# EAGLE board roboboard2_backup1 (EAGLE 6.3)
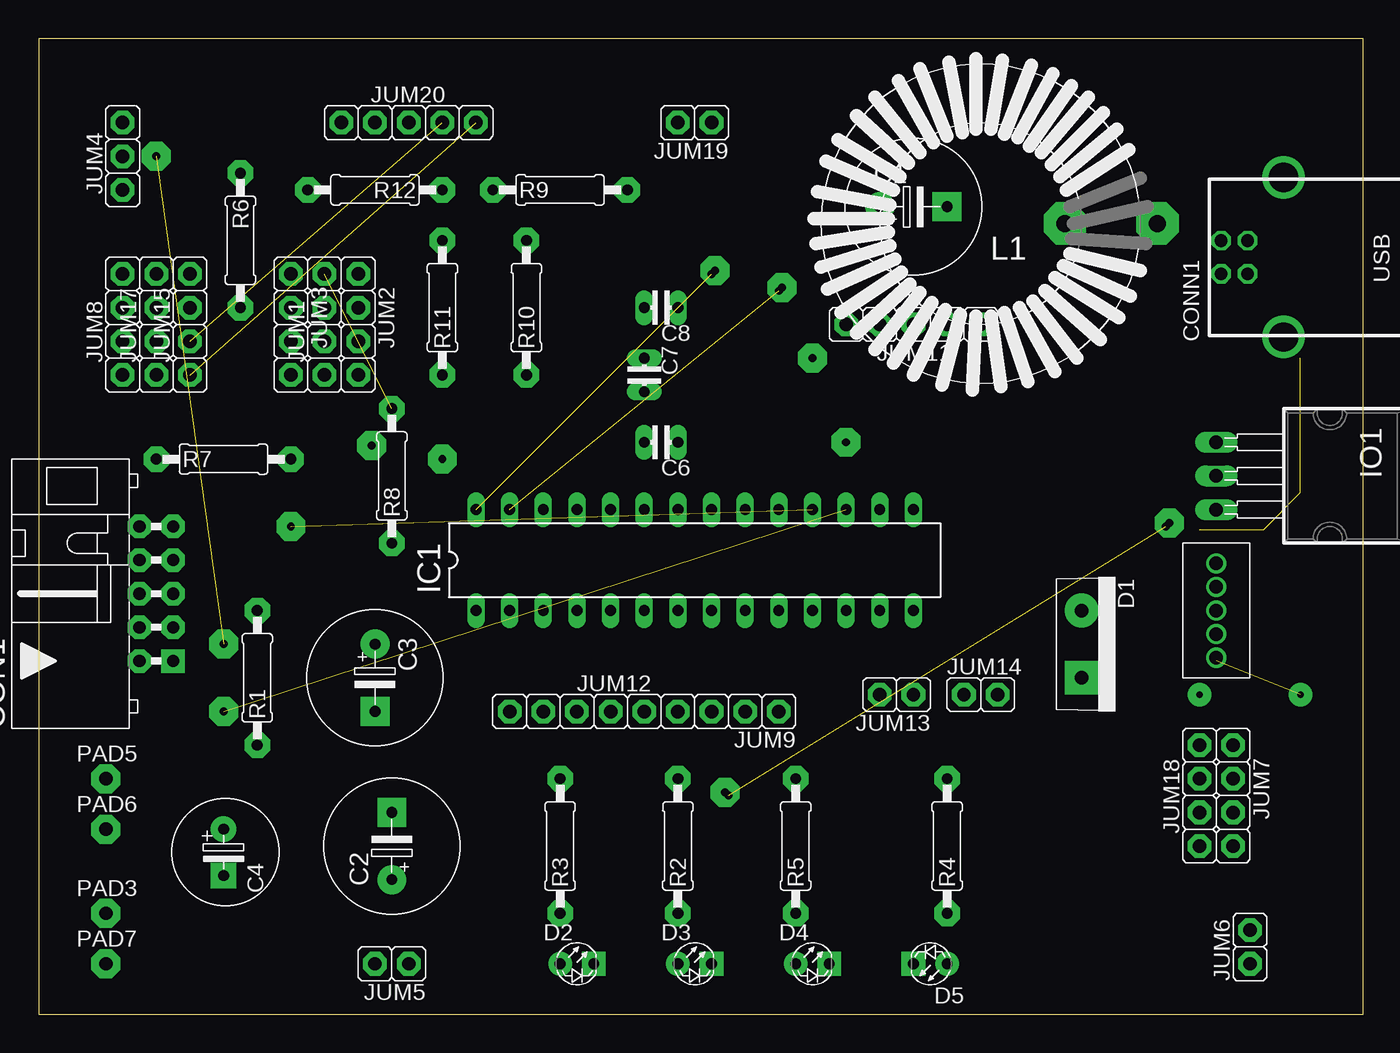
[diagram p0: board, top side]
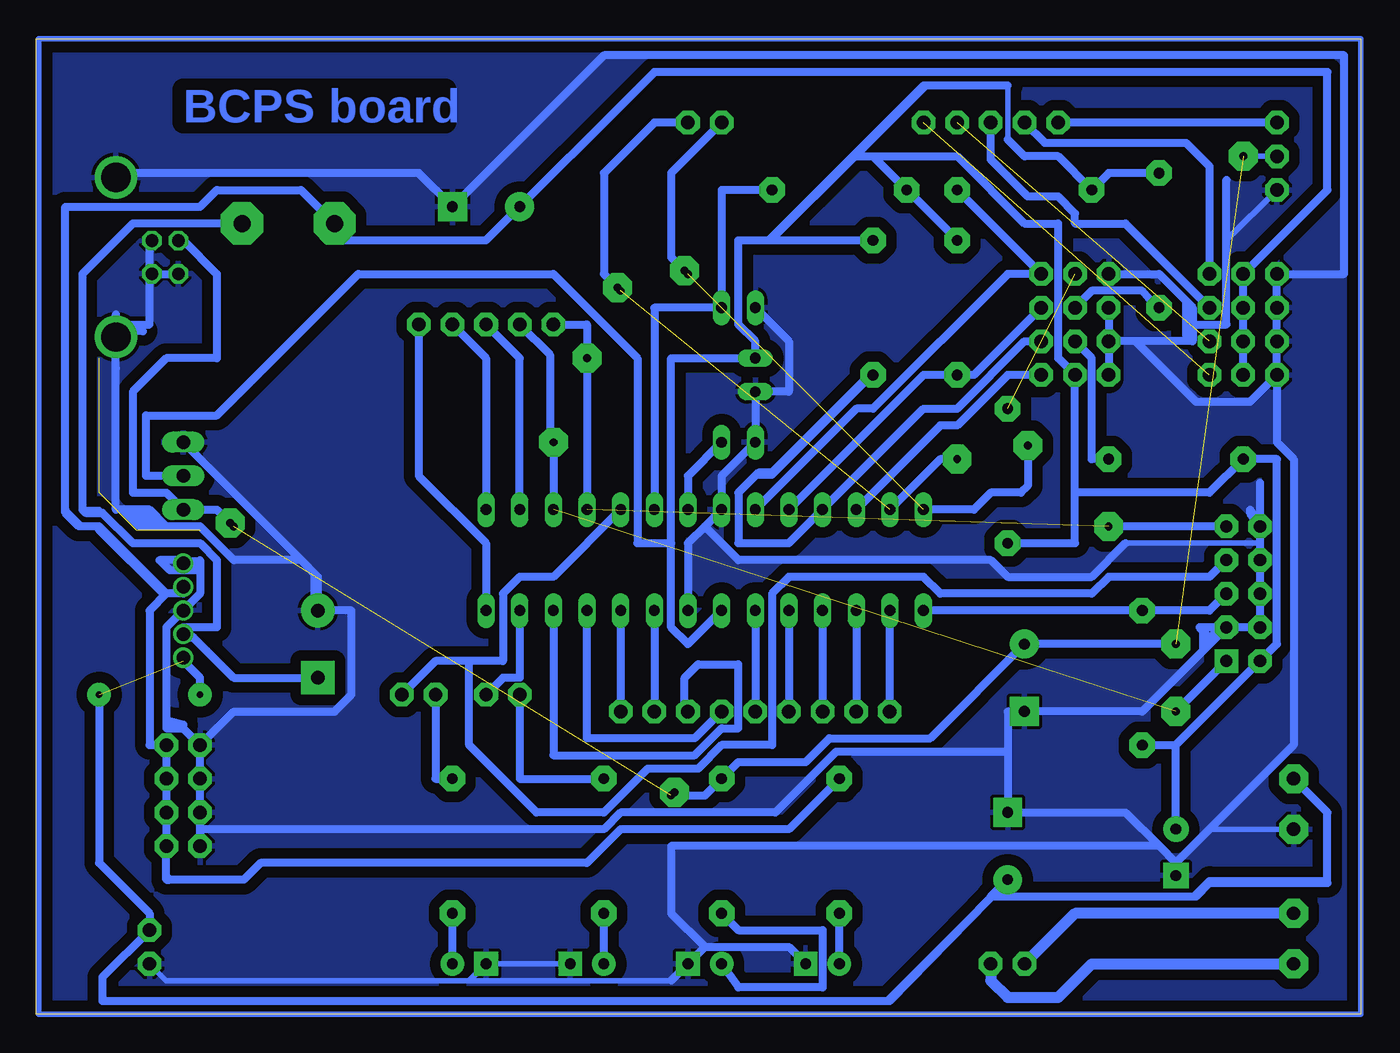
[diagram p1: board, bottom side, seen from below]

Size 100 x 73.65 mm. Coordinates in mm from the lower left corner, seen from the top.
Outline: 0,0 100,0 100,73.65 0,73.65 0,0
Copper layers (1*16): Top 0.035mm / dielectric 1.5mm / Bottom 0.035mm
Design rules "default": minimum track width 10mil, minimum drill 24mil, track to track 8mil, track to pad 8mil, pad to pad 8mil, via to via 8mil, smd to smd 8mil, copper to edge 40mil, drill to drill 8mil, minimum pad ring 10mil, minimum via ring 8mil, stop-mask expansion 4mil, vias tented up to drill 0mil, thermal gap 10mil

## Footprints (pad centres in the part's own frame; a part is rotated, then mirrored left to right if it is on the bottom)
C-EL_5 = drill 0.813 pad 2.184: C+ -2.54,0 | drill 0.813 pad 2.184 square: C- 2.54,0
C-EL_3,5 = drill 0.813 pad 1.93: C+ 0,0 | drill 0.813 pad 1.93 square: C- 3.493,0
C-2,5 = drill 0.813 pad 1.27 long: 1 -1.27,0; 2 1.27,0
MLW10A = drill 0.914 pad 1.778 square: 1 -5.08,-1.27 | drill 0.914 pad 1.778 octagon: 2 -5.08,1.27; 3 -2.54,-1.27; 4 -2.54,1.27; 5 0,-1.27; 6 0,1.27; 7 2.54,-1.27; 8 2.54,1.27; 9 5.08,-1.27; 10 5.08,1.27
PN61729 = drill 0.95 octagon: 1 1.25,4.71; 2 -1.25,4.71; 3 -1.25,2.71; 4 1.25,2.71 | drill 2.2: P$1 -6.02,0; P$2 6.02,0
TO-220AC = drill 1.016 pad 2.54: A -2.54,0 | drill 1.016 pad 2.54 square: K 2.54,0
LED_3 = drill 0.813 pad 1.778: A -1.27,0 | drill 0.813 pad 1.778 square: K 1.27,0
DIL28-3 = drill 0.813 long: 1 -16.51,-3.81; 2 -13.97,-3.81; 3 -11.43,-3.81; 4 -8.89,-3.81; 5 -6.35,-3.81; 6 -3.81,-3.81; 7 -1.27,-3.81; 8 1.27,-3.81; 9 3.81,-3.81; 10 6.35,-3.81; 11 8.89,-3.81; 12 11.43,-3.81; 13 13.97,-3.81; 14 16.51,-3.81; 15 16.51,3.81; 16 13.97,3.81; 17 11.43,3.81; 18 8.89,3.81; 19 6.35,3.81; 20 3.81,3.81; 21 1.27,3.81; 22 -1.27,3.81; 23 -3.81,3.81; 24 -6.35,3.81; 25 -8.89,3.81; 26 -11.43,3.81; 27 -13.97,3.81; 28 -16.51,3.81
TO-220 = drill 1.016 pad 1.6 long: 1 -2.54,0; 2 0,0; 3 2.54,0
S1G4_JUM = drill 1.016 pad 1.778 octagon: 1 -3.81,0; 2 -1.27,0; 3 1.27,0; 4 3.81,0
S1G3_JUM = drill 1.016 pad 1.778 octagon: 1 -2.54,0; 2 0,0; 3 2.54,0
S1G2_JUM = drill 1.016 pad 1.778 octagon: 1 -1.27,0; 2 1.27,0
S1G5_JUM = drill 1.016 pad 1.778 octagon: 1 -5.08,0; 2 -2.54,0; 3 0,0; 4 2.54,0; 5 5.08,0
S1G7_JUM = drill 1.016 pad 1.778 octagon: 1 -7.62,0; 2 -5.08,0; 3 -2.54,0; 4 0,0; 5 2.54,0; 6 5.08,0; 7 7.62,0
FED_2200 = drill 1.27 pad 3.2 octagon: 1 -13.335,0; 2 -6.35,0
PAD_1 = drill 1.016 pad 2.184 octagon: 1 0,0
R-10 = drill 0.813 pad 1.93 octagon: 1 -5.08,0; 2 5.08,0
LM2576 = drill 1.016: 1 -3.556,0; 2 -1.778,0; 3 0,0; 4 1.778,0; 5 3.556,0

## Placement (x,y rotation side)
C1  1000uF  [C-EL_5]  66.04,60.96 0 top
C2  100uF  [C-EL_5]  26.67,12.7 90 top
C3  0,47uF  [C-EL_5]  25.4,25.4 270 top
C4  0,33uF  [C-EL_3,5]  13.97,13.97 270 top
C6  100n  [C-2,5]  46.99,43.18 180 top
C7  100n  [C-2,5]  45.72,48.26 270 top
C8  100n  [C-2,5]  46.99,53.34 180 top
CON1  ISP  [MLW10A]  8.89,31.75 90 top
CONN1  USB  [PN61729]  93.98,57.15 90 top
D1  1N5822  [TO-220AC]  78.74,27.94 270 top
D2  LED_3  [LED_3]  40.64,3.81 0 top
D3  LED_3  [LED_3]  49.53,3.81 0 top
D4  LED_3  [LED_3]  58.42,3.81 0 top
D5  LED_3  [LED_3]  67.31,3.81 180 top
IC1  MEGA8-P  [DIL28-3]  49.53,34.29 0 top
IO1  LM3940IT  [TO-220]  88.9,40.64 270 top
JUM1  senzory_ir_reflex  [S1G4_JUM]  21.59,52.07 90 top
JUM2  senzory_ir_reflex_signal  [S1G4_JUM]  24.13,52.07 270 top
JUM3  senzory_ir_reflex_GND  [S1G4_JUM]  19.05,52.07 270 top
JUM4  regulator_vstup  [S1G3_JUM]  6.35,64.77 90 top
JUM5  motor_6V_out  [S1G2_JUM]  26.67,3.81 180 top
JUM6  napajeni_Maestro  [S1G2_JUM]  91.44,5.08 90 top
JUM7  piny_+5V  [S1G4_JUM]  90.17,16.51 270 top
JUM8  senzor_vzdal_-  [S1G4_JUM]  6.35,52.07 90 top
JUM9  S1G2_JUMP  [S1G2_JUM]  54.61,22.86 180 top
JUM11  S1G5_JUMP  [S1G5_JUM]  66.04,52.07 180 top
JUM12  S1G7_JUMP  [S1G7_JUM]  43.18,22.86 0 top
JUM13  jumper  [S1G2_JUM]  64.77,24.13 180 top
JUM14  jumper1  [S1G2_JUM]  71.12,24.13 0 top
JUM15  senzor_vzdal_signal_in  [S1G4_JUM]  11.43,52.07 90 top
JUM17  senzor_vzdal_+  [S1G4_JUM]  8.89,52.07 90 top
JUM18  piny_-5V  [S1G4_JUM]  87.63,16.51 90 top
JUM19  I2C  [S1G2_JUM]  49.53,67.31 180 top
JUM20  out_vzdal_senzor_signal  [S1G5_JUM]  27.94,67.31 0 top
L1  100uH  [FED_2200]  71.12,59.69 180 top
PAD3  motor_6V_in  [PAD_1]  5.08,7.62 0 top
PAD5  11,1V  [PAD_1]  5.08,17.78 0 top
PAD6  PAD_1-  [PAD_1]  5.08,13.97 0 top
PAD7  6V_motor  [PAD_1]  5.08,3.81 0 top
R1  10k  [R-10]  16.51,25.4 90 top
R2  120  [R-10]  48.26,12.7 90 top
R3  120  [R-10]  39.37,12.7 90 top
R4  120  [R-10]  68.58,12.7 90 top
R5  120  [R-10]  57.15,12.7 90 top
R6  120  [R-10]  15.24,58.42 270 top
R7  120  [R-10]  13.97,41.91 0 top
R8  120  [R-10]  26.67,40.64 90 top
R9  10uH  [R-10]  39.37,62.23 0 top
R10  120  [R-10]  36.83,53.34 90 top
R11  120  [R-10]  30.48,53.34 90 top
R12  120  [R-10]  25.4,62.23 180 top
U$1  LM2576  [LM2576]  88.9,30.48 90 top

## Library data of the parts
C1-C4 C6-C8 CON1 D1-D5 IO1 JUM1-JUM9 JUM11-JUM15 JUM17-JUM20 L1 PAD3 PAD5-PAD7 R1-R12 = #PaJa_22
CONN1 = dodolcd
IC1 = atmel; OC_FARNELL: unknown; OC_NEWARK: unknown
U$1 = LM2576

## Nets
+5V: C1.C+ JUM7.1 JUM7.2 JUM7.3 JUM7.4 JUM17.1 JUM17.2 JUM17.3 JUM17.4 L1.2 R3.2 U$1.4
GND: C1.C- C2.C- C3.C- C4.C- C6.2 C7.2 C8.2 CON1.3 CON1.4 CON1.6 CON1.8 CON1.10 CONN1.2 CONN1.3 CONN1.4 CONN1.P$1 CONN1.P$2 D1.A D2.K D3.K D4.K D5.K IC1.8 IC1.22 IO1.1 JUM3.1 JUM3.2 JUM3.3 JUM3.4 JUM4.1 JUM6.1 JUM8.1 JUM8.2 JUM8.3 JUM8.4 JUM18.1 JUM18.2 JUM18.3 JUM18.4 PAD6.1 U$1.3 U$1.5
N$1: D1.K L1.1 U$1.2
N$2: C6.1 IC1.21
N$3: C8.1 IC1.20 R9.2
N$4: CON1.5 IC1.1 R1.2
N$5: IC1.24 JUM2.2 R11.1
N$6: IC1.25 JUM2.3 R10.1
N$7: IC1.23 JUM2.1 R12.1
N$8: IC1.26 JUM2.4
N$9: IC1.27 JUM19.1
N$10: IC1.28 JUM19.2
N$11: IC1.2 JUM12.1
N$12: IC1.3 JUM12.2
N$13: IC1.4 JUM12.3
N$14: IC1.5 JUM12.4
N$15: IC1.6 JUM12.5
N$16: IC1.11 JUM12.6
N$17: IC1.12 JUM12.7
N$18: IC1.13 JUM13.1
N$19: IC1.14 JUM11.1
N$20: IC1.15 JUM11.2
N$21: CON1.1 IC1.17 JUM11.4
N$22: IC1.16 JUM11.3
N$23: CON1.9 IC1.18 JUM11.5
N$24: CON1.7 IC1.19 JUM14.2
N$25: JUM5.1 PAD7.1
N$26: IC1.9 JUM9.2
N$28: D4.A R5.1
N$29: JUM4.3 JUM20.1
N$30: D3.A R2.1
N$31: D2.A R3.1
N$32: C2.C+ JUM6.2 PAD5.1 U$1.1
N$33: JUM5.2 PAD3.1
N$34: IC1.10 JUM9.1
N$35: D5.A R4.1
N$36: JUM13.2 R5.2
N$37: JUM1.2 R7.2
N$38: JUM1.3 R6.2
N$39: JUM1.4 R8.2
N$40: JUM14.1 R4.2
N$41: JUM15.1 JUM20.5
N$42: JUM15.2 JUM20.4
N$43: JUM15.3 JUM20.3
N$44: JUM15.4 JUM20.2
N$48: C4.C+ C7.1 CON1.2 IC1.7 IO1.2 JUM1.1 R1.1 R6.1 R7.1 R8.1 R9.1 R10.2 R11.2 R12.2
VCC: C3.C+ CONN1.1 IO1.3 JUM4.2 R2.2

## Tracks (layer width: path | path; a pad name or v marks a point on that pad's centre or on a via)
+5V
  Bottom 0.254: JUM7.1 JUM7.2 JUM7.3 90.17,12.95 | JUM17.1 JUM17.2 JUM17.3 JUM17.4 | 81.28,62.23 86.36,62.23
  Bottom 0.406: 53.34,71.12 C1.C+ 66.04,58.42 | JUM17.4 JUM17.1 | 97.79,38.1 96.52,36.83 95.25,36.83 | JUM7.4 90.17,12.95 | 88.9,31.75 U$1.4 | U$1.4 89.15,32.26 | 89.15,32.26 89.15,32 | 89.15,32.26 89.15,32.51 88.9,32.51 U$1.4
  Bottom 0.61: 90.17,10.41 90.17,10.16 89.92,10.16 | 90.17,10.41 90.17,12.95 JUM7.1 91.44,20.32 91.44,30.48 90.17,31.75 | 89.92,10.16 84.33,10.16 83.06,11.43 58.42,11.43 55.88,13.97 43.18,13.97 R3.2 | 89.92,10.16 90.17,10.41 | 90.17,31.75 88.9,31.75 88.9,32.51 | 95.25,36.83 95.25,36.58 90.42,31.75 90.17,31.75 | 95.25,36.83 90.17,31.75 | 95.25,36.83 96.77,36.83 97.79,37.85 97.79,38.1 97.79,60.96 87.63,60.96 86.36,62.23 80.01,62.23 L1.2 77.47,58.42 66.04,58.42 53.34,71.12 2.54,71.12 2.54,62.23 JUM17.4 8.89,48.01
GND
  Bottom 0.254: JUM18.1 JUM18.2 JUM18.3 JUM18.4 | 87.63,31.75 U$1.3 90.17,29.21 | 88.9,34.29 U$1.5 | 88.9,55.88 CONN1.2 | 91.44,58.42 CONN1.4 | 91.44,55.88 CONN1.3 | 93.98,52.07 CONN1.P$1 93.98,48.77 | 49.53,5.08 D3.K 52.07,2.54 | 93.98,63.5 CONN1.P$2 | JUM8.1 JUM8.2 JUM8.3 JUM8.4 | 7.62,35.56 CON1.8 CON1.6 CON1.4 | 26.67,22.86 C3.C- 16.51,22.86 | 13.97,11.43 C4.C-
  Bottom 0.406: 5.08,20.32 11.43,13.97 | 11.43,13.97 13.97,11.43 | C2.C- 26.67,20.07 | 26.67,20.07 26.67,22.86 | JUM4.1 10.16,58.42 10.16,52.07 12.7,52.07 | 12.7,52.07 12.7,50.8 17.02,50.8 JUM3.3 | 12.7,52.07 12.7,53.34 | JUM3.2 JUM3.3 | JUM3.3 JUM3.4 | 93.98,63.5 93.98,62.23 | 91.44,55.88 91.44,58.42 | 52.07,2.54 67.31,2.54 | 67.31,2.54 D5.K D4.K | 67.31,2.54 90.17,2.54 JUM6.1 | PAD6.1 11.43,13.97 | CON1.10 7.62,35.56 | 7.62,35.56 CON1.4 CON1.3 | 7.62,35.56 17.78,35.56 | 87.63,34.29 88.65,34.29 88.9,34.29 | 86.36,13.97 57.15,13.97 | 26.92,19.81 26.67,20.07
  Bottom 0.61: JUM18.4 JUM18.1 87.63,13.97 57.15,13.97 55.88,15.24 44.2,15.24 39.62,19.81 26.92,19.81 | JUM18.4 88.9,21.59 90.17,21.59 90.17,29.21 87.63,31.75 87.63,34.29 | JUM18.4 85.09,22.86 77.47,22.86 76.2,24.13 76.2,30.48 D1.A | D1.A 78.99,30.48 78.99,33.02 78.74,33.02 | 78.74,33.02 D1.A | 78.74,33.02 80.01,34.29 | 80.01,34.29 85.09,34.29 87.63,36.83 90.17,36.83 | 90.17,36.83 91.44,38.1 93.47,38.1 | 93.47,38.1 93.98,38.1 93.98,48.77 93.98,52.07 | 93.98,52.07 91.44,52.07 91.44,55.88 91.19,55.88 | 91.19,55.88 88.9,55.88 | 91.19,55.88 91.44,56.13 91.44,58.42 | 80.01,34.29 IO1.1 | C8.2 43.18,50.8 43.18,46.99 C7.2 C6.2 48.26,40.64 IC1.22 49.53,36.83 | 49.53,36.83 50.8,35.56 IC1.8 | 49.53,36.83 46.99,34.29 27.94,34.29 26.67,33.02 20.32,33.02 17.78,35.56 | CON1.3 11.68,27.69 | 11.68,27.69 11.94,27.43 | 11.94,27.43 16.51,22.86 26.67,22.86 C2.C- 17.78,15.24 15.24,12.7 | 15.24,12.7 13.97,11.43 | 13.97,11.43 13.97,10.41 | 13.97,11.43 5.08,20.32 5.08,41.91 6.35,43.18 6.35,46.74 JUM8.1 | JUM8.1 8.38,46.23 12.45,46.23 17.02,50.8 | JUM3.3 12.7,50.8 12.7,53.34 15.24,55.88 JUM3.1 | 15.24,12.7 52.07,12.7 52.07,7.62 49.53,5.08 | 49.53,5.08 43.18,5.08 D2.K | 49.53,5.08 52.07,2.54 | 93.98,61.98 93.98,63.5 71.12,63.5 C1.C- 57.15,72.39 1.27,72.39 1.27,55.88 JUM8.4 JUM8.1 | 7.62,40.13 CON1.10 | CON1.10 CON1.4 12.19,29.21 11.68,28.7 11.68,27.69 | 11.68,27.69 10.92,28.96 | 11.94,28.7 11.94,27.43 | 8.38,38.1 CON1.10 | 8.38,37.85 CON1.10 | 90.17,36.83 92.2,36.83 93.47,38.1 | 93.47,38.1 90.93,37.08 | 88.65,34.29 90.68,34.29 89.92,33.53 87.88,33.53 87.88,34.04 U$1.5 | 93.98,52.07 93.98,52.83 | 12.95,52.07 10.16,52.07 10.16,62.99
  pour Bottom (isolate 0.813): 0,73.66 0,0 100.33,0 100.33,73.66
N$1
  Bottom 0.254: 85.09,59.69 L1.1 | 88.9,29.21 U$1.2
  Bottom 0.406: 85.09,59.69 92.71,59.69 | 96.52,38.1 95.25,38.1 95,37.85 | 88.9,29.21 87.12,27.43 | 85.09,25.4 D1.K
  Bottom 0.61: 84.33,59.69 92.71,59.69 96.52,55.88 96.52,38.1 96.27,37.85 95,37.85 92.71,35.56 87.63,35.56 86.36,34.29 86.36,29.21 88.9,29.21 88.9,28.45 88.14,28.45 87.12,27.43 85.09,25.4 78.49,25.4
N$2
  Bottom 0.61: C6.1 50.8,40.64 IC1.21
N$3
  Bottom 0.61: R9.2 48.26,62.23 C8.1 53.34,53.34 IC1.20
N$4
  Bottom 0.406: 11.43,30.48 R1.2 IC1.1
  Bottom 0.61: CON1.5 11.43,30.48 IC1.1
N$5
  Bottom 0.406: 33.02,48.26 R11.1 29.21,48.26
  Bottom 0.61: JUM2.2 29.21,48.26 33.02,48.26 IC1.24
N$6
  Bottom 0.406: JUM2.3 25.4,50.8 | 33.02,45.72 IC1.25 43.18,35.56 | R10.1 44.45,40.64 45.72,40.64 46.99,39.37
  Bottom 0.61: R10.1 37.08,48.26 44.45,40.89 45.47,40.89 46.99,39.37 46.99,35.56 43.18,35.56 33.02,45.72 30.48,45.72 25.4,50.8 23.88,50.8
N$7
  Bottom 0.61: R12.1 JUM2.1 26.67,55.88 36.83,45.72 38.1,45.72 IC1.23
N$8
  Bottom 0.406: JUM2.4 26.67,48.26
  Bottom 0.61: 23.88,48.26 26.67,48.26 30.48,44.45 31.75,44.45 IC1.26
N$9  (via drill 0.6 pad 1.27, 0.6 pad 2.18)  (1 unrouted)
  Bottom 0.61: JUM19.1 53.34,67.31 57.15,63.5 57.15,55.88 v56.13,54.86 v55.88,54.61 | v30.48,41.91 31.75,41.91 IC1.27
N$10  (via drill 0.6 pad 1.27, 0.6 pad 2.18)  (1 unrouted)
  Bottom 0.61: JUM19.2 52.07,63.5 52.07,57.15 v51.05,56.13 v50.8,55.88 | v25.15,42.93 25.15,39.88 25.65,39.37 27.94,39.37 29.21,38.1 IC1.28
N$11
  Bottom 0.61: JUM12.1 IC1.2
N$12
  Bottom 0.61: IC1.3 JUM12.2
N$13
  Bottom 0.61: IC1.4 JUM12.3
N$14
  Bottom 0.61: IC1.5 JUM12.4
N$15
  Bottom 0.61: IC1.6 JUM12.5
N$16
  Bottom 0.61: JUM12.6 50.29,20.83 58.42,20.83 IC1.11
N$17
  Bottom 0.61: JUM12.7 51.05,23.11 51.05,25.4 50.04,26.42 46.99,26.42 46.99,21.59 48.26,21.59 50.29,19.56 60.96,19.56 IC1.12
N$18
  Bottom 0.61: IC1.13 63.5,25.4 64.77,25.4 JUM13.1
N$19
  Bottom 0.61: JUM11.1 71.12,40.64 66.04,35.56 IC1.14
N$20
  Bottom 0.61: JUM11.2 66.04,49.53 IC1.15
N$21  (via drill 0.6 pad 2.18)  (1 unrouted)
  Bottom 0.61: JUM11.4 61.21,49.78 61.21,43.18 v60.96,43.18 IC1.17 | CON1.1 v13.97,22.86
N$22
  Bottom 0.61: IC1.16 63.5,49.53 JUM11.3
N$23  (via drill 0.6 pad 2.18)  (1 unrouted)
  Bottom 0.406: 58.42,52.07 v58.42,49.53 IC1.18
  Bottom 0.61: CON1.9 v19.05,36.83 | JUM11.5 58.42,52.07 IC1.18
N$24
  Bottom 0.61: IC1.19 60.96,33.02 63.5,33.02 64.77,31.75 64.77,26.67 67.31,26.67 | 67.31,26.67 69.85,26.67 JUM14.2 | CON1.7 11.43,33.02 19.05,33.02 20.32,31.75 31.75,31.75 33.02,33.02 43.18,33.02 44.45,31.75 44.45,20.32 48.26,20.32 50.04,18.54 53.85,18.54 57.15,15.24 62.23,15.24 67.31,20.32 67.31,26.67
N$25
  Bottom 0.813: JUM5.1 27.94,2.54 26.67,1.27 22.86,1.27 20.32,3.81 PAD7.1
N$26
  Bottom 0.61: IC1.9 JUM9.2
N$27  (via drill 0.6 pad 2.18)
  Bottom 0.406: 52.32,16.51 51.82,16.51 v51.82,16.76
N$28
  Bottom 0.61: D4.A R5.1
N$29
  Bottom 0.61: JUM4.3 JUM20.1
N$30
  Bottom 0.61: R2.1 46.99,6.35 40.64,6.35 40.64,2.03 46.99,2.03 D3.A
N$31
  Bottom 0.61: D2.A R3.1
N$32  (via drill 0.5 pad 1.78)  (1 unrouted)
  Bottom 0.406: 88.9,26.67 U$1.1 88.9,27.18 | 95,1.02 35.81,1.02 27.94,8.89 12.7,8.89 11.43,10.16 2.54,10.16 2.54,15.24
  Bottom 0.61: v95.25,24.13 95.25,11.43 91.44,7.62 JUM6.2 95,2.79 95,1.02 35.56,1.02 C2.C+ 27.94,8.89 12.45,8.89 11.43,9.91 2.54,9.91 2.54,15.24 PAD5.1 | v87.63,24.13 87.63,25.4 88.9,26.67 88.9,27.18
N$33
  Bottom 0.813: PAD3.1 21.59,7.62 JUM5.2
N$34
  Bottom 0.61: IC1.10 JUM9.1
N$35
  Bottom 0.61: D5.A R4.1
N$36
  Bottom 0.61: JUM13.2 63.5,17.78 R5.2
N$37
  Bottom 0.61: R7.2 20.32,41.91 20.32,49.53 JUM1.2
N$38
  Bottom 0.406: R6.2 16.51,54.61
  Bottom 0.61: 15.24,53.09 16.51,54.61 20.32,54.61 JUM1.3
N$39  (1 unrouted)
N$40
  Bottom 0.61: JUM14.1 69.85,17.78 R4.2
N$41  (1 unrouted)
N$42  (1 unrouted)
N$43
  Bottom 0.406: 27.94,66.04 JUM20.3
  Bottom 0.61: JUM20.3 27.94,64.52 25.15,61.72 22.86,61.72 21.59,60.45 21.59,59.69 17.78,59.69 JUM15.3
N$44
  Bottom 0.406: 11.43,64.01 JUM15.4
  Bottom 0.61: JUM20.2 23.88,65.79 13.21,65.79 11.43,64.01 11.43,55.63
N$45
  Bottom 0.61: 19.05,53.59 19.05,48.01
N$46  (3 unrouted)
N$47
  Bottom 0.61: 88.9,21.84 89.92,22.1
N$48
  Bottom 0.254: 13.97,20.32 CON1.2 6.35,27.94 | R11.2 R9.1 36.83,64.77 | 44.45,58.42 44.7,58.42
  Bottom 0.406: R6.1 19.05,63.5 | 26.67,66.04 26.67,70.1 32.77,70.1 38.1,64.77 44.45,58.42 R10.2 | 91.69,40.64 IO1.2
  Bottom 0.61: 88.65,40.64 91.69,40.64 91.69,45.21 86.36,45.21 75.69,55.88 60.96,55.88 54.61,49.53 54.61,35.56 52.07,35.56 | 52.07,35.56 52.07,49.53 C7.1 45.72,50.8 46.99,52.07 46.99,58.42 44.7,58.42 | 44.7,58.42 R10.2 | 26.67,66.04 25.4,64.77 22.86,64.77 R12.2 19.05,63.5 14.99,63.5 | 38.1,64.77 36.83,64.77 | 36.83,64.77 30.48,64.77 25.4,59.69 22.86,59.69 22.86,49.53 JUM1.1 21.59,39.37 | 26.67,70.1 33.02,70.1 44.7,58.42 | IC1.7 50.8,27.94 52.07,29.21 52.07,35.56 | R8.1 21.59,35.56 21.59,39.37 | R1.1 13.97,20.32 | C4.C+ 13.97,20.32 | 13.97,20.32 6.35,27.94 6.35,41.91 R7.1 11.43,39.37 21.59,39.37 | R11.2 36.83,64.77
N$49
  Bottom 0.61: 13.21,53.59 13.21,51.31
N$54
  Bottom 0.406: 0,0 0,73.66 99.82,73.66 99.82,0 0,0
S$1
  Bottom 0.61: 91.44,37.59 91.69,37.85 91.95,37.34 92.2,37.08
S$2
  Bottom 0.61: 91.95,51.56 93.73,51.56
VCC  (via drill 0.6 pad 1.27, 0.6 pad 2.18)  (2 unrouted)
  Bottom 0.254: 88.9,58.42 CONN1.1
  Bottom 0.406: v52.07,16.51 49.53,16.51 R2.2 46.99,19.05 | JUM4.2 v8.89,64.77 | v85.09,36.83 v85.34,37.08 86.36,38.1
  Bottom 0.61: 89.15,58.42 88.9,58.42 86.36,55.88 86.36,49.53 90.17,49.53 92.71,46.99 92.71,39.37 90.17,39.37 IO1.3 86.36,38.1 v85.09,36.83 | 89.15,58.42 89.41,58.17 89.41,58.42 89.15,58.42 | 52.58,16.51 49.53,16.51 46.99,19.05 41.91,19.05 40.13,20.83 32.51,20.83 C3.C+ v13.97,27.94

## Text on the board
Bottom: BCPS board